# Altium PCB CAN Logger 3d HP3561 PCB.PcbDoc (part 1 of 3)
Units mil, origin at the board's own origin, x right, y up, seen from the top; angles counter-clockwise.
Board outline 2229 x 3254 mil, 4 copper layers (Component Side, Signal Layer 2, Signal Layer 1, Solder Side), stack 33.234 mil thick; 117 components, 131 nets, 581 pads, 372 vias.
Unrouted connection lines stored in the file: 2.
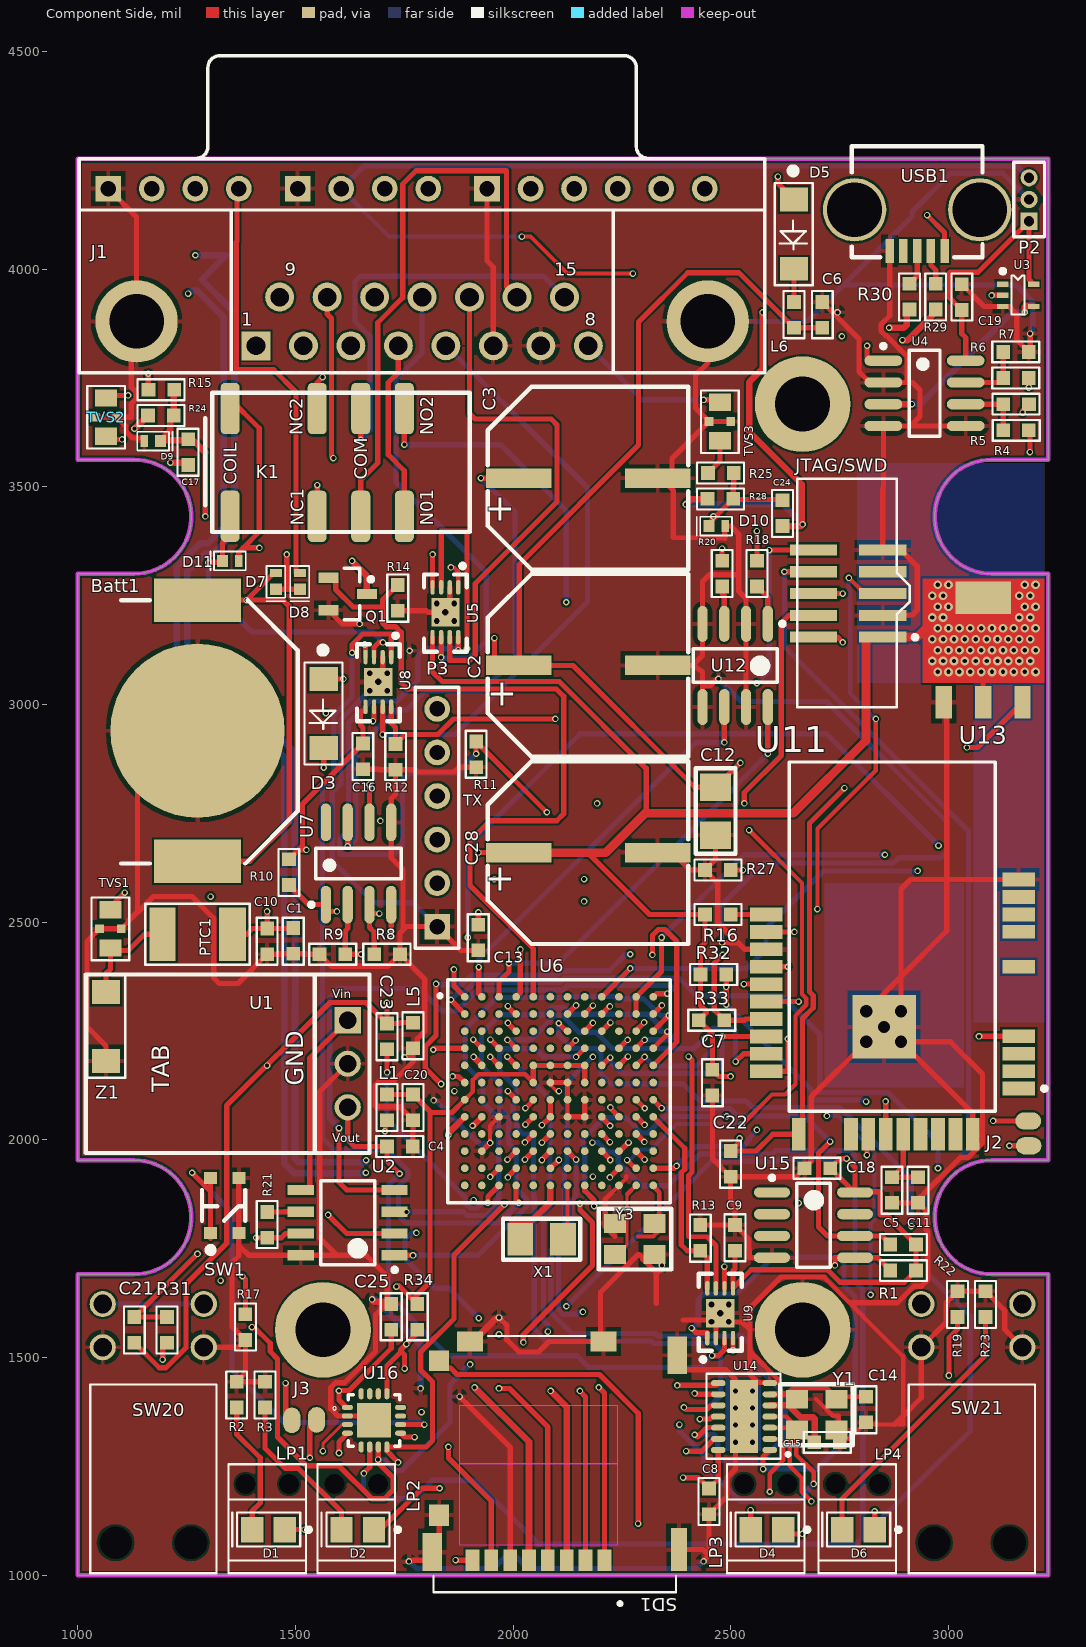
[diagram p0: Component Side view]
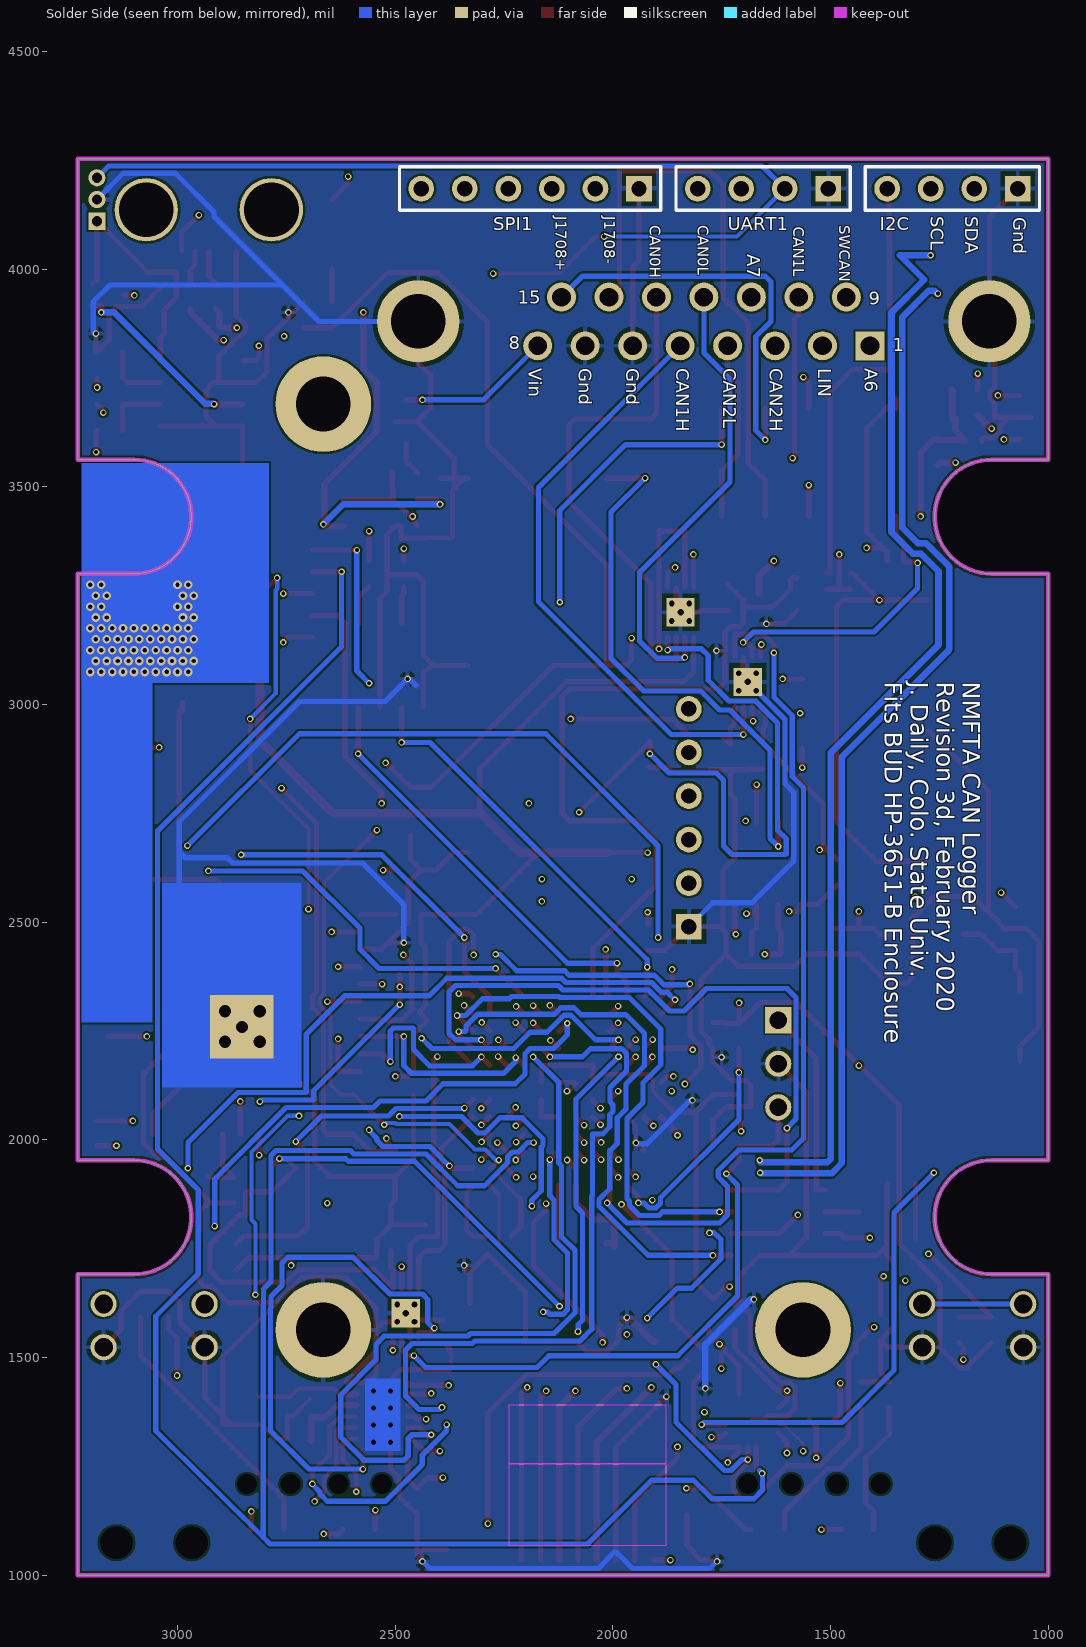
[diagram p1: Solder Side view, seen from below]
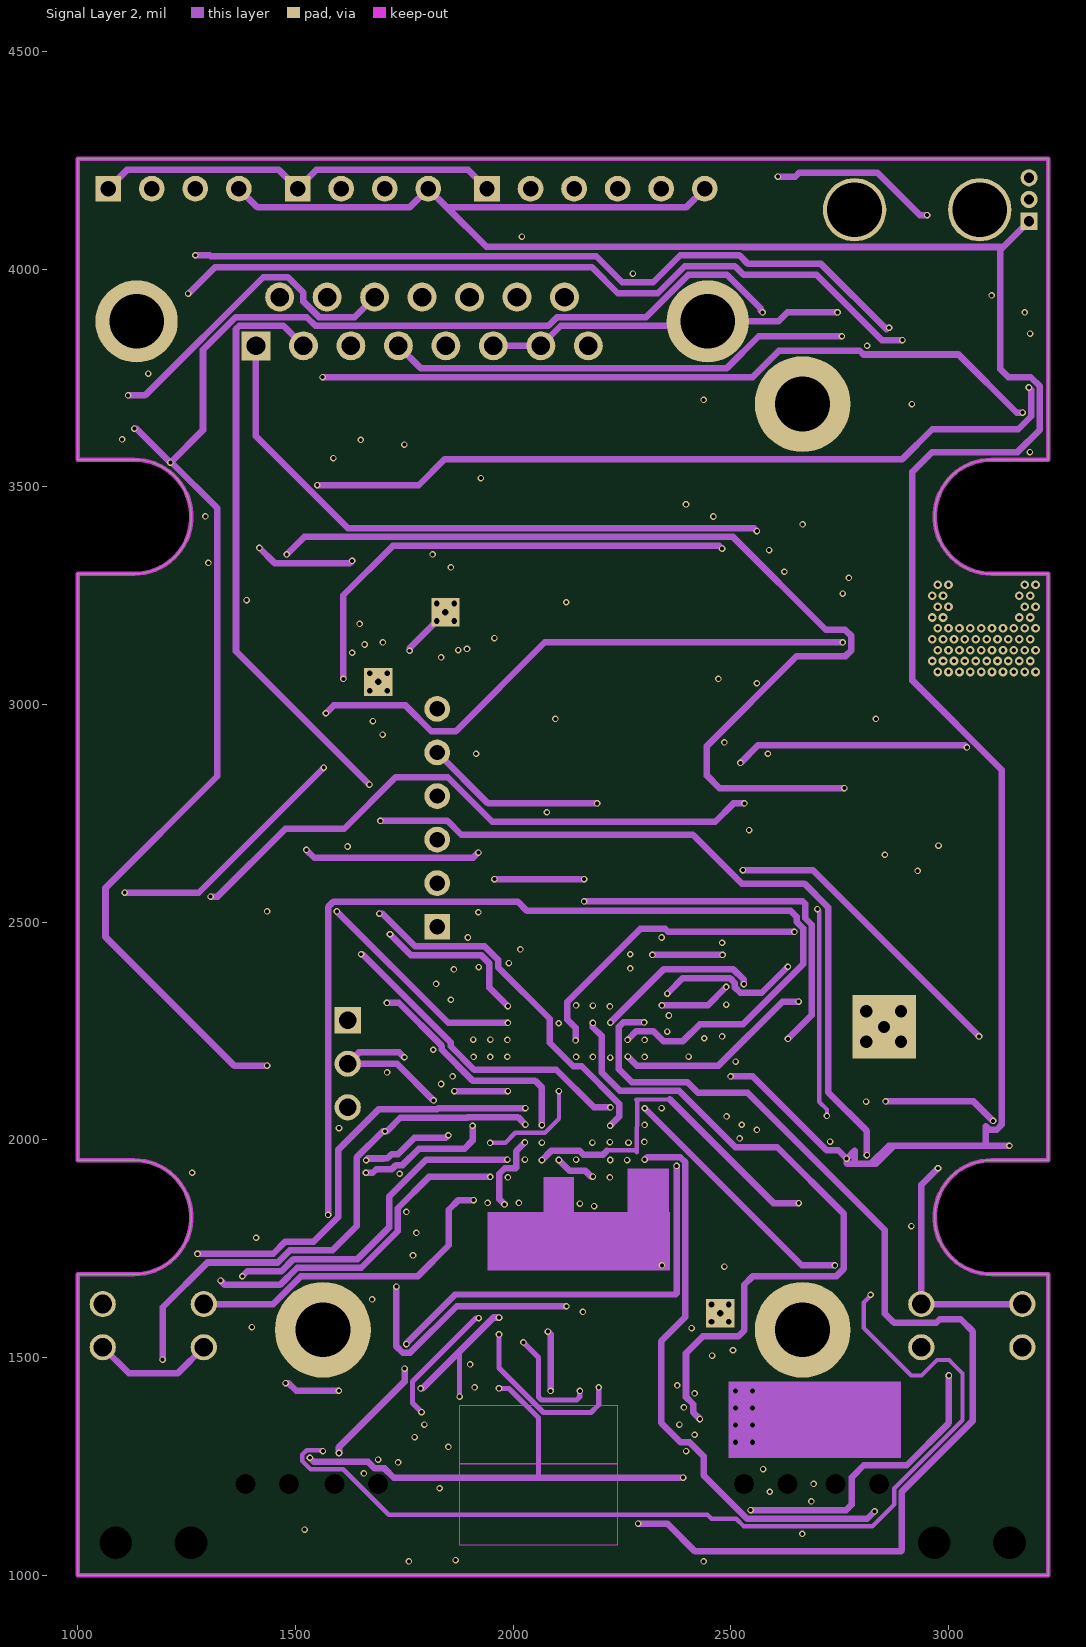
[diagram p2: Signal Layer 2]
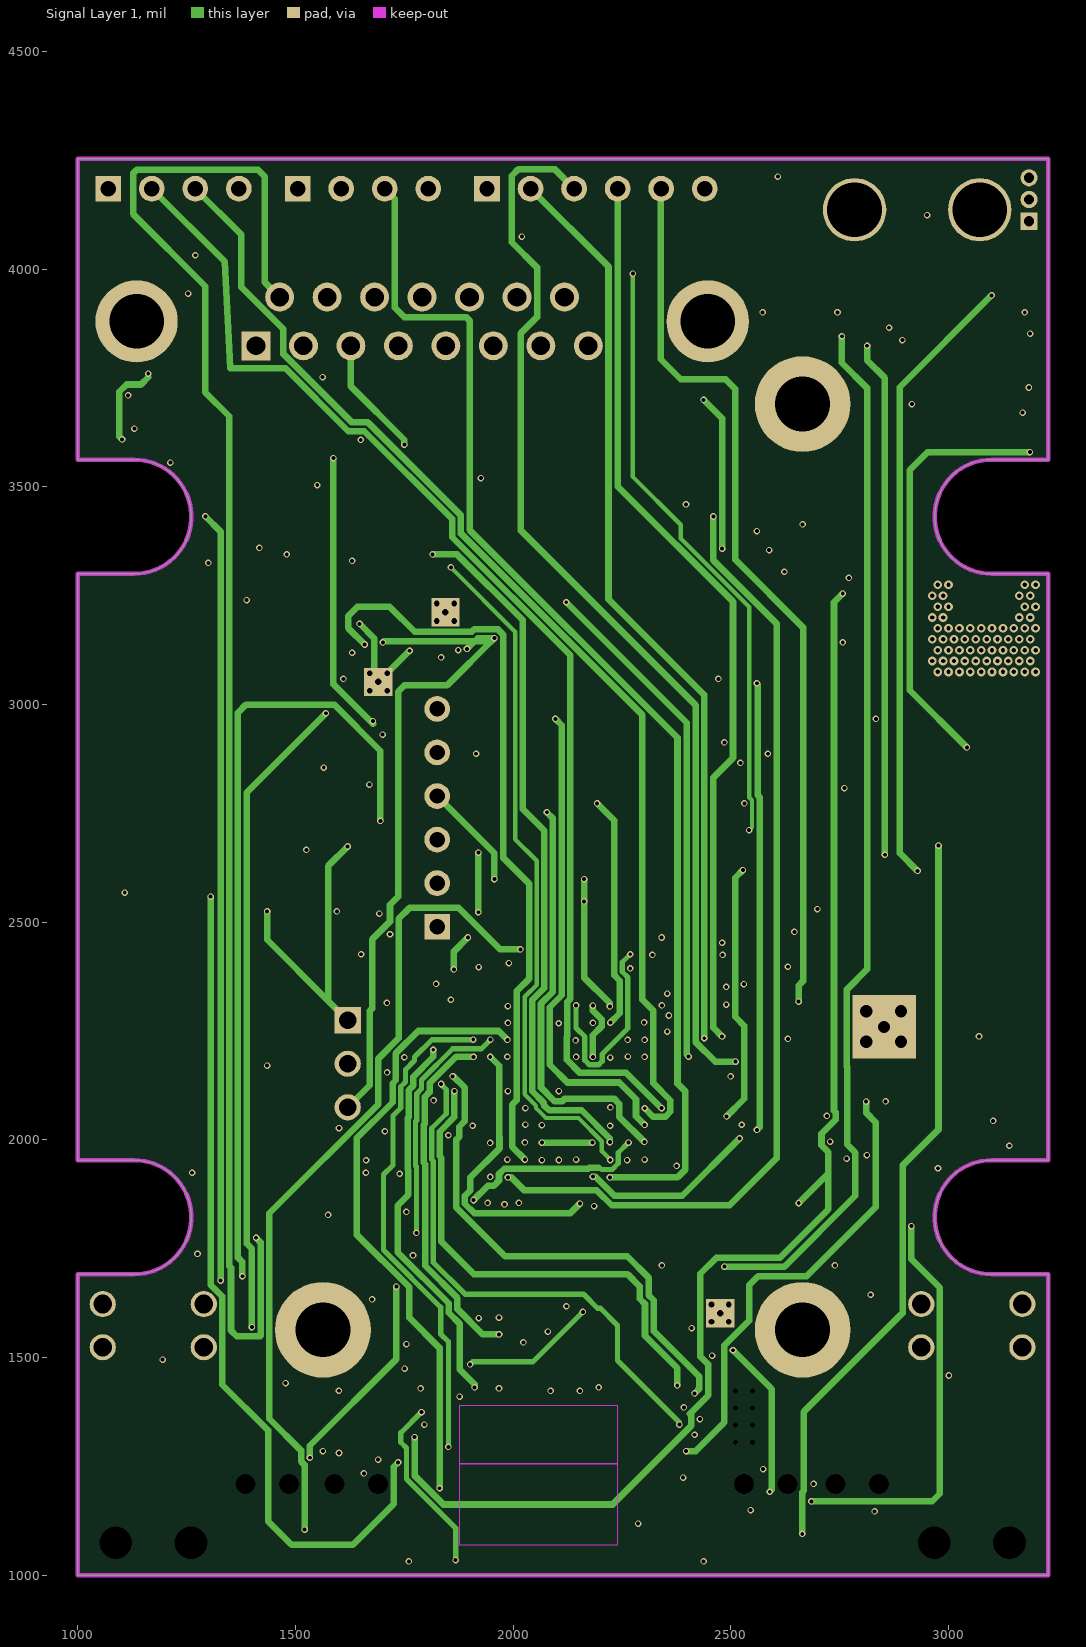
[diagram p3: Signal Layer 1]

## Layer stack, top to bottom
Top Solder: solder mask 0.4, Solder Resist, Dk 3.5
Component Side: signal copper 1.4
Dielectric 1: core 12.6, FR-4, Dk 4.8
Signal Layer 2: signal copper 1.417
Dielectric 5: prepreg 5, Dk 4.2
Signal Layer 1: signal copper 1.417
Dielectric 4: core 10, Dk 4.2
Solder Side: signal copper 1.4
Bottom Solder: solder mask 0.4, Solder Resist, Dk 3.5

## Board outline
1000,1000 1000,1691.5 1130,1691.5 ccw(c1130,1822.5) 1130,1953.5 1000,1953.5 1000,3300.5 1130,3300.5 ccw(c1130,3431.5) 1130,3562.5 1000,3562.5 1000,4254 3229,4254 3229,3562.5 3099,3562.5 ccw(c3099,3431.5) 3099,3300.5 3229,3300.5 3229,1953.5 3099,1953.5 ccw(c3099,1822.5) 3099,1691.5 3229,1691.5 3229,1000

## Design rules (kind name [scope] priority, off if disabled: settings)
Clearance [InComponent('U16')] p1: gap=3 ignorepadtopadclearanceinfootprint=TRUE
Clearance Clearance_1 [All] p2: gap=5 ignorepadtopadclearanceinfootprint=TRUE
DiffPairsRouting [All] p1: maxlimit=10 minlimit=10 mostfreqgap=10 toplayer_minwidth=15 toplayer_maxwidth=15 toplayer_prefwidth=15 midlayer1_minwidth=15 midlayer1_maxwidth=15 midlayer1_prefwidth=15 midlayer2_minwidth=15 midlayer2_maxwidth=15 midlayer2_prefwidth=15 bottomlayer_minwidth=15 bottomlayer_maxwidth=15 bottomlayer_prefwidth=15 maxuncoupledlength=500
HoleSize [All] p1: absolutevalues=TRUE maxlimit=250 minlimit=9 maxpercent=80.000 minpercent=20.000
MinimumSolderMaskSliver [All] p1: minsoldermaskwidth=1
PolygonConnect [All] p1: connectstyle=Relief reliefconductorwidth=10 reliefentries=4 polygonreliefangle="90 Angle" airgapwidth=10
RoomDefinition "DIY Teensy 3.6" [InComponentClass('DIY Teensy 3.6')] p1: confinementstyle=ConfineIn formatcopy=TRUE lockcomponents=FALSE outline 0,0 2000,0 2000,1000 0,1000
RoomDefinition "Additional Circuits - Handheld - Rev 3d" [InComponentClass('Additional Circuits - Handheld - Rev 3d')] p2: confinementstyle=ConfineIn formatcopy=TRUE lockcomponents=FALSE outline 0,0 2000,0 2000,1000 0,1000
RoutingVias [All] p1: holewidth=9 width=15 viastyle="Through Hole" minholewidth=9 minwidth=15 maxholewidth=28 maxwidth=50
SMDNeckDown [All] p1: percent=150.000
SilkToSilkClearance [All] p1: silktosilkclearance=1
SilkToSolderMaskClearance [IsPad] p1: minsilkscreentomaskgap=1 clearancetoexposedcopper=TRUE
SolderMaskExpansion [All] p1: expansion=4
Width Width_1 [All] p1: maxlimit=100 minlimit=7 preferedwidth=15 toplayer_prefwidth=12 midlayer1_minwidth=10 midlayer2_minwidth=10 bottomlayer_minwidth=10 bottomlayer_prefwidth=12 minimp=50.000000 maximp=50.000000 favimp=50.000000
25 further rules are at their usual default settings.

## Classes and differential pairs
component class "DIY Teensy 3.6": Batt1 C7 C13 C16 C18 C19 C20 C21 C22 C23 C25 D7 D8 J3 JTAG/SWD L1 L5 R31 R34 SD1 SW1 U6 U16 X1 Y3
component class "Teensy 3.6 with J1939 - Handheld Rev3d": C9 C10 C14 C15 C17 C24 D1 D2 D4 D6 D9 D10 I2C J1 P2 R2 R3 R8 R9 R10 R11 R12 R13 R15 R18 R19 R20 R21 R23 R24 R25 R28 R32 R33 SW20 SW21 TVS2 TVS3 U2 U5 U7 U8 U9 U12 U14 UART1 Y1
component class "Additional Circuits - Handheld - Rev 3d": C1 C2 C3 C4 C5 C6 C8 C11 C12 C28 D3 D5 D11 J2 K1 L6 LP1 LP2 LP3 LP4 P3 PTC1 Q1 R1 R4 R5 R6 R7 R14 R16 R17 R22 R27 R29 R30 SPI1 TVS1 U1 U3 U4 U11 U13 U15 USB1 Z1
differential pair "USB D": +"USB D_P" -"USB D_N"

## Components (designator, comment, footprint, x,y, rotation, side; value= is the part's Value field where it differs from the comment)
Batt1 "CR1225" "Battery Clip - CR1225" 1275,2940 r270 top locked
C1 "0.1uF" 0603 1495,2457.07 r90 top
C2 "470µF" "Elec. Cap - G" 2172.6,3090 r180 top locked
C3 "100uF" "Elec. Cap - G" 2172.6,3520 r180 top locked
C4 "0.1uF" 0603 1740,1985 r0 top
C5 "0.1uF" 0603 2870,1885 r90 top
C6 "0.1uF" 0603 2710,3895 r270 top
C7 "0.1uF" 0603 2457.6,2131.85 r90 top
C8 "0.1uF" 0603 2450,1170 r90 top
C9 "0.1uF" 0603 2509.37,1775 r270 top
C10 "2.2uF" 0603 1435,2455.93 r270 top
C11 "0.1uF" 0603 2930,1885 r90 top
C12 "22uF" 1206 2465,2755.12 r90 top
C13 "0.1uF" 0603 1920,2465 r90 top
C14 "16pF" 0603 2810.5,1380.85 r90 top
C15 "16pF" 0603 2720.85,1305.63 r180 top
C16 "2.2uF" 0603 1655,2881.15 r90 top
C17 "0.1uF" 0603 1253.5,3580 r90 top
C18 "0.1uF" 0603 2698.72,1935 r0 top
C19 "0.1uF" 0603 3030.55,3935.91 r270 top
C20 "0.1uF" 0603 1770,2075 r90 top
C21 "0.1uF" 0603 1130,1564 r90 top
C22 "0.1uF" 0603 2499.52,1945 r90 top
C23 "0.1uF" 0603 1710.47,2237.79 r90 top
C24 "0.1uF" 0603 2618.79,3439.53 r90 top
C25 "0.1uF" 0603 1720,1593.53 r270 top
C28 "470µF" "Elec. Cap - G" 2172.6,2660 r180 top locked
D1 "Green" "0805 POLARIZED" 1440,1105 r180 top
D2 "Red" "0805 POLARIZED" 1645,1105 r180 top
D3 "ACURA107-HF" "SMA with A and K" 1565,3059 r270 top
D4 "Yellow" "0805 POLARIZED" 2585,1105 r180 top
D5 "ACURA107-HF" "SMA with A and K" 2645,4160 r270 top
D6 "Blue" "0805 POLARIZED" 2795,1105 r180 top
D7 "Diode" CST2C 1455,3302.4 r180 top
D8 "Diode" CST2C 1510,3302.4 r180 top
D9 "Diode" CST2C 1152.64,3605 r270 top
D10 "Diode" CST2C 2486.93,3410 r90 top
D11 "Diode" CST2C 1370,3330 r90 top
I2C "Header 4" HDR1X4 1070,4185 r0 bottom
J1 "Vehicle Interface Cable Connector" DSUB1.385-2H15 1790.91,4254.02 r0 top locked
J2 "Solder Jumper" "Solder Jumper" 3185,2025 r90 top
J3 "Solder Jumper" "Solder Jumper" 1530,1355 r0 top
JTAG/SWD "JTAG/SWD" "JTAG 10-pin Header" 2769.53,3255 r90 top locked
K1 "EE2-5NU" "RELAY - EE2" 1350,3680 r0 top
L1 "1k" 0603 1710.47,2075 r90 top
L5 "1k" 0603 1770,2240 r90 top
L6 "1k" 0603 2645,3895 r270 top
LP1 "SLP3" PCBComponent_1 1524,1255 r180 top locked
LP2 "SLP3" PCBComponent_1 1729,1255 r180 top locked
LP3 "SLP3" PCBComponent_1 2669,1255 r180 top locked
LP4 "SLP3" PCBComponent_1 2879,1255 r180 top locked
P2 "DNP GP-20U7 JST Header" MHDR1X3 3185,4110 r90 top
P3 "Header 6" HDR1X6 1825.47,2490 r90 top
PTC1 "PTC RESTTBLE 0.75A" 1812 1275,2472.5 r0 top
Q1 "NUD3124" SOT23_N 1620,3254.1 r0 top
R1 "4.7k" 0603 2896,1700 r180 top
R2 "100" 0603 1365,1415 r90 top
R3 "330" 0603 1430,1415 r90 top
R4 "4.7k" 0603 3155,3630 r180 top
R5 "47" 0603 3155.47,3690 r0 top
R6 "47" 0603 3155,3750 r0 top
R7 "4.7k" 0603 3155,3810 r0 top
R8 "100k" 0603 1710.47,2426.39 r0 top
R9 "100k" 0603 1585,2426.61 r180 top
R10 "4.7k" 0603 1485,2615 r90 top
R11 "100k" 0603 1915,2885.47 r270 top
R12 "100k" 0603 1730,2880 r270 top
R13 "100k" 0603 2430,1775 r90 top
R14 "100k" 0603 1735,3245 r90 top
R15 "100k" 0603 1192,3723 r0 top
R16 "100k" 0603 2470,2517.79 r180 top
R17 "100k" 0603 1385,1570 r270 top
R18 "10k" 0603 2560,3300.5 r270 top
R19 "330" 0603 3020.84,1623 r90 top
R20 "10k" 0603 2480,3300.5 r270 top
R21 "4.7k" 0603 1435,1805 r270 top
R22 "4.7k" 0603 2896,1760 r180 top
R23 "330" 0603 3085,1623 r90 top
R24 "10k" 0603 1190.85,3664 r180 top
R25 "100k" 0603 2477.07,3531.85 r0 top
R27 "100k" 0603 2470,2620 r180 top
R28 "10k" 0603 2475.93,3472.53 r180 top
R29 "47" 0603 2970.55,3937.06 r90 top
R30 "47" 0603 2910.55,3937.06 r90 top
R31 "330" 0603 1205,1564 r90 top
R32 "100k" 0603 2460,2380 r180 top
R33 "100k" 0603 2455.62,2275 r180 top
R34 "10k" 0603 1779.75,1593.53 r270 top locked
SD1 "503182-1852" *MOLEX_503182-1852_503182-1852(PRIMARY) 2095.5,1285 r180 top locked
SPI1 "Header 6" HDR1X6 1940,4185 r0 bottom
SW1 "PTS830" "Switch PTS830" 1305,1786.65 r90 top
SW20 "PB400" PB400 1057.5,1623 r270 top locked
SW21 "PB400" PB400 2937.5,1623 r270 top locked
TVS1 "Varistor 42V" TRANSFEED 1075,2535 r270 top
TVS2 "Varistor 42V" TRANSFEED 1065,3710 r270 top
TVS3 "Varistor 42V" TRANSFEED 2475,3700 r270 top
U1 "OKI-78SR" OKI-78SR 1620,2075 r90 top locked
U2 "NCV7356D1R2G" ONSC-SOIC-8-751-07_V 1620,1810 r180 top
U3 "74AHCT1G14" SOT-353 3160,3940 r270 top
U4 "SN75HVD08DR" SOIC-SN8_N 2945,3715 r0 top
U5 "MCP2558" TDFN 1844.53,3212.09 r180 top
U6 "MK66FX1M0VMD18" *BGA144C100P12X12_1300X1300X170_MK66FX1M0VMD18(Primary) 2105.32,2112.17 r0 top locked
U7 "MCP2003A-E/SN" SOIC-SN8_N 1645,2635 r90 top
U8 "MCP2558" TDFN 1690.47,3052.09 r180 top
U9 "MCP2558" TDFN 2475.47,1602.09 r0 top
U11 "ATML-ATWINC1500-MR210PA-28" ATML-ATWINC1500-MR210PA-28_V 2871,2305.47 r180 top locked
U12 "MOCD207R2M" SOIC-8 2510,3090 r270 top
U13 "NCP1117LPST33" SOT-223 2988.9,3005 r0 top
U14 "MCP2517FD" SOP14 2589.37,1287.91 r180 top
U15 "ATECC608A" SOIC-8 2689.92,1804.53 r0 top
U16 "MKL02Z32VFG4" *QFN50P300X300X65-17N 1680.47,1356.02 r0 top locked
UART1 "Header 4" HDR1X4 1505,4185 r0 bottom
USB1 "UX60SC-MB-5S8" "USB Mini UX60S" 2927.99,4282.16 r180 top
X1 "32.768 KHz" "XTAL 2-pad Small" 2114.5,1771.89 r180 top
Y1 "40MHz" "XTAL 4 pad" 2742.49,1404.52 r180 top
Y3 "16MHz" "XTAL 4 pad" 2234.01,1737 r0 top
Z1 "SMA6J" SMA 1065,2181 r90 top

## Footprints (in the part's own frame and the unit in brackets; to place one, negate y for a bottom-side part, rotate by r counter-clockwise, add the part's x,y. Pads: shape width x height; smd on the part's side, far side on the other; paste and mask are expansions set on the pad)
0603 [mm] "0603 SMP Component with outline"
  rect 0.8x0.8 smd: 1(-0.75,0) 2(0.75,0)
  silkscreen extent -1.39,-0.61 1.36,0.61
"0805 POLARIZED" [mm] "Polarized 0805 with Pin 1 as Anode (+)"
  rect 1.3x1.5 smd: 1(-0.899,0) 2(1.001,0)
  silkscreen extent -2.39,-0.99 2.16,0.99
1206 [mm]
  rect 1.6x1.8 smd: 1(-1.4,0) 2(1.4,0)
  silkscreen extent -2.47,-1.16 2.5,1.15
1812 [mil] "Used for PTC Fuses from belfuse"
  rect 60x122 smd: 1(-80,0)
  rect 62x122 smd: 2(80,0)
  silkscreen extent -120,-70 120,70
*BGA144C100P12X12_1300X1300X170_MK66FX1M0VMD18(Primary) [mm]
  round 0.45 smd: A1(-5.5,5.5) A2(-4.5,5.5) A3(-3.5,5.5) A4(-2.5,5.5) A5(-1.5,5.5) A6(-0.5,5.5) A7(0.5,5.5) A8(1.5,5.5) A9(2.5,5.5) A10(3.5,5.5) A11(4.5,5.5) A12(5.5,5.5) B1(-5.5,4.5) B2(-4.5,4.5) B3(-3.5,4.5) B4(-2.5,4.5) B5(-1.5,4.5) B6(-0.5,4.5) B7(0.5,4.5) B8(1.5,4.5) B9(2.5,4.5) B10(3.5,4.5) B11(4.5,4.5) B12(5.5,4.5) C1(-5.5,3.5) C2(-4.5,3.5) C3(-3.5,3.5) C4(-2.5,3.5) C5(-1.5,3.5) C6(-0.5,3.5) C7(0.5,3.5) C8(1.5,3.5) C9(2.5,3.5) C10(3.5,3.5) C11(4.5,3.5) C12(5.5,3.5) D1(-5.5,2.5) D2(-4.5,2.5) D3(-3.5,2.5) D4(-2.5,2.5) D5(-1.5,2.5) D6(-0.5,2.5) D7(0.5,2.5) D8(1.5,2.5) D9(2.5,2.5) D10(3.5,2.5) D11(4.5,2.5) D12(5.5,2.5) E1(-5.5,1.5) E2(-4.5,1.5) E3(-3.5,1.5) E4(-2.5,1.5) E5(-1.5,1.5) E6(-0.5,1.5) E7(0.5,1.5) E8(1.5,1.5) E9(2.5,1.5) E10(3.5,1.5) E11(4.5,1.5) E12(5.5,1.5) F1(-5.5,0.5) F2(-4.5,0.5) F3(-3.5,0.5) F4(-2.5,0.5) F5(-1.5,0.5) F6(-0.5,0.5) F7(0.5,0.5) F8(1.5,0.5) F9(2.5,0.5) F10(3.5,0.5) F11(4.5,0.5) F12(5.5,0.5) G1(-5.5,-0.5) G2(-4.5,-0.5) G3(-3.5,-0.5) G4(-2.5,-0.5) G5(-1.5,-0.5) G6(-0.5,-0.5) G7(0.5,-0.5) G8(1.5,-0.5) G9(2.5,-0.5) G10(3.5,-0.5) G11(4.5,-0.5) G12(5.5,-0.5) H1(-5.5,-1.5) H2(-4.5,-1.5) H3(-3.5,-1.5) H4(-2.5,-1.5) H5(-1.5,-1.5) H6(-0.5,-1.5) H7(0.5,-1.5) H8(1.5,-1.5) H9(2.5,-1.5) H10(3.5,-1.5) H11(4.5,-1.5) H12(5.5,-1.5) J1(-5.5,-2.5) J2(-4.5,-2.5) J3(-3.5,-2.5) J4(-2.5,-2.5) J5(-1.5,-2.5) J6(-0.5,-2.5) J7(0.5,-2.5) J8(1.5,-2.5) J9(2.5,-2.5) J10(3.5,-2.5) J11(4.5,-2.5) J12(5.5,-2.5) K1(-5.5,-3.5) K2(-4.5,-3.5) K3(-3.5,-3.5) K4(-2.5,-3.5) K5(-1.5,-3.5) K6(-0.5,-3.5) K7(0.5,-3.5) K8(1.5,-3.5) K9(2.5,-3.5) K10(3.5,-3.5) K11(4.5,-3.5) K12(5.5,-3.5) L1(-5.5,-4.5) L2(-4.5,-4.5) L3(-3.5,-4.5) L4(-2.5,-4.5) L5(-1.5,-4.5) L6(-0.5,-4.5) L7(0.5,-4.5) L8(1.5,-4.5) L9(2.5,-4.5) L10(3.5,-4.5) L11(4.5,-4.5) L12(5.5,-4.5) M1(-5.5,-5.5) M2(-4.5,-5.5) M3(-3.5,-5.5) M4(-2.5,-5.5) M5(-1.5,-5.5) M6(-0.5,-5.5) M7(0.5,-5.5) M8(1.5,-5.5) M9(2.5,-5.5) M10(3.5,-5.5) M11(4.5,-5.5) M12(5.5,-5.5)
  silkscreen extent -7.05,-6.5 6.5,6.5
*MOLEX_503182-1852_503182-1852(PRIMARY) [mm]
  rect 0.8x1.24 smd: 1(-2.9,6.355) 2(-1.8,6.355) 3(-0.7,6.355) 4(0.4,6.355) 5(1.5,6.355) 6(2.6,6.355) 7(3.7,6.355) 8(4.8,6.355)
  rect 1.16x1.2 smd: DT(6.74,-5.275)
  rect 0.95x2.5 smd: P1(-7.245,5.725)
  rect 1.15x2.2 smd: P2(7.145,5.875) P3(-7.145,-5.605)
  rect 1.5x1.15 smd: P4(-2.84,-6.4) P5(4.94,-6.4)
  rect 1.16x1.25 smd: SW(6.74,3.725)
  Keep-Out Layer region: -3.655,5.485 5.55,5.485 5.55,0.726 -3.655,0.726
  Keep-Out Layer region: -3.659,0.725 5.55,0.725 5.55,-2.682 -3.659,-2.682
  silkscreen extent -7.07,-6.72 7.07,8.99
*QFN50P300X300X65-17N [mm]
  oval 0.65x0.3 smd: 1(-1.55,0.75) 2(-1.55,0.25) 3(-1.55,-0.25) 4(-1.55,-0.75) 9(1.55,-0.75) 10(1.55,-0.25) 11(1.55,0.25) 12(1.55,0.75)
  oval 0.3x0.65 smd: 5(-0.75,-1.55) 6(-0.25,-1.55) 7(0.25,-1.55) 8(0.75,-1.55) 13(0.75,1.55) 14(0.25,1.55) 15(-0.25,1.55) 16(-0.75,1.55)
  rect 2x2 smd: 17(0,0)
  silkscreen extent -2.4,-1.5 1.5,1.5
ATML-ATWINC1500-MR210PA-28_V [mm] "Module, 28-Leads, Body 21.72x14.73mm, Pitch 1.016mm"
  rect 1.9x0.8 smd: 1(-7.365,4.761) 2(-7.365,3.745) 3(-7.365,2.729) 4(-7.365,1.713) 5(-7.365,-2.351) 6(-7.365,-4.383) 7(-7.365,-5.399) 8(-7.365,-6.415) 9(-7.365,-7.431) 10(7.365,-5.393) 11(7.365,-4.377) 12(7.365,-3.361) 13(7.365,-2.345) 14(7.365,-1.329) 15(7.365,-0.313) 16(7.365,0.703) 17(7.365,1.719) 18(7.365,2.735) 19(7.365,3.751)
  rect 0.8x1.9 smd: 20(5.465,7.431) 21(2.417,7.431) 22(1.401,7.431) 23(0.385,7.431) 24(-0.631,7.431) 25(-1.647,7.431) 26(-2.663,7.431) 27(-3.679,7.431) 28(-4.695,7.431)
  rect 3.7x3.7 hole 0.711: 29(0.485,1.161)
  silkscreen extent -8.99,-14.29 6.01,6.08, body extent -7.36,-14.29 7.36,7.43, height 3.35
"Battery Clip - CR1225" [mil] "Battery Holder Outlline for CR2032"
  rect 100x200 smd: 1(-300,0) 1(300,0)
  round 400 smd: 2(0,0)
  silkscreen extent -300,-175 305,230
CST2C [mm] "Toshiba 0603 diode"
  rect 0.7x0.45 smd: 1(0,0)
  rect 0.7x0.65 smd: 2(0,0.95)
  silkscreen extent -0.55,-0.4 0.55,1.65
DSUB1.385-2H15 [mm] "Connector; D Subminiature; 15 Position; Right Angle; Pitch 1.385 mm"
  rect 1.69x1.69 hole 1.09: 1(-9.695,-10.92)
  round 1.69 hole 1.09: 2(-6.925,-10.92) 3(-4.155,-10.92) 4(-1.385,-10.92) 5(1.385,-10.92) 6(4.155,-10.92) 7(6.925,-10.92) 8(9.695,-10.92) 9(-8.31,-8.08) 10(-5.54,-8.08) 11(-2.77,-8.08) 12(0,-8.08) 13(2.77,-8.08) 14(5.54,-8.08) 15(8.31,-8.08)
  round 4.8 hole 3.18: 16(-16.66,-9.5) 17(16.66,-9.5)
  silkscreen extent -20,-12.5 20,6
"Elec. Cap - G" [mil] "Panasonic Style Electrolytic capacitor, Can size G, 10mm diameter"
  rect 150x45 smd: 1(159.45,0) 2(-159.45,0)
  silkscreen extent -229,-210 231,210
HDR1X4 [mm] "Connector; Header; 4 Position"
  rect 1.5x1.5 hole 0.9: 1(0,0)
  round 1.5 hole 0.9: 2(2.54,0) 3(5.08,0) 4(7.62,0)
  silkscreen extent -1.27,-1.27 8.89,1.27
HDR1X6 [mm] "Connector; Header; 6 Position"
  rect 1.5x1.5 hole 0.9: 1(0,0)
  round 1.5 hole 0.9: 2(2.54,0) 3(5.08,0) 4(7.62,0) 5(10.16,0) 6(12.7,0)
  silkscreen extent -1.27,-1.27 13.97,1.27
"JTAG 10-pin Header" [mm] "1.27mm pitch Box Header SMT Type"
  rect 0.65x2.76 smd: 1(-2.54,-2.02) 2(-2.54,2.02) 3(-1.27,-2.02) 4(-1.27,2.02) 5(0,-2.02) 6(0,2.02) 7(1.27,-2.02) 8(1.27,2.02) 9(2.54,-2.02) 10(2.54,2.02)
  silkscreen extent -6.64,-4.03 6.71,2.97
MHDR1X3 [mm] "Connector; Header; 3 Position"
  rect 1x1 hole 0.6: 1(0,0)
  round 1 hole 0.6: 2(1.27,0) 3(2.54,0)
  silkscreen extent -0.9,-0.9 3.44,0.9
OKI-78SR [mil] "Horizontal Mount SIP DC/DC Converter"
  rect 60x60 hole 40: 1(200,0)
  round 60 hole 40: 2(100,0) 3(0,0)
  silkscreen extent -105,-50 305,602
ONSC-SOIC-8-751-07_V [mm] "SOIC, 8-Leads, Body 4.9x3.9mm, Pitch 1.27mm"
  rect 1.52x0.6 smd: 1(-2.74,1.905) 2(-2.74,0.635) 3(-2.74,-0.635) 4(-2.74,-1.905) 5(2.74,-1.905) 6(2.74,-0.635) 7(2.74,0.635) 8(2.74,1.905)
  silkscreen extent -2.87,-2.45 1.58,2.88, body extent -1.95,-2.45 1.95,2.45, height 1.75
PB400 [mil]
  round 60 hole 43: 1(0,0) 2(99,0) 3(0,232) 4(99,232)
  round 0 hole 75: ""(548,29.5) ""(548,202.5)
  silkscreen extent 185,-29 618,261
PCBComponent_1 [mil]
  round 0 hole 46: ""(39,45) ""(139,45)
  silkscreen extent 0,0 178,250
"RELAY - EE2" [mm] "EE2 Relay"
  rrect50% 1.11x3 smd: 1(7.62,0) 2(5.08,0) 3(10.16,0) 4(7.62,-6.29) 5(5.08,-6.29) 6(10.16,-6.29) 7(0,-6.29) 8(0,0)
  silkscreen extent -1.45,-7.2 13.98,0.92
SMA [mil] "SMA with outline"
  rect 55x65 smd: 1(0,0) 2(159,0)
  silkscreen extent -38,-44 197,43
"SMA with A and K" [mil] "SMA with outline and Cathode Bar on Pin 2"
  rect 55x65 smd: 1(0,0) 2(159,0)
  silkscreen extent -71,-44 197,43
SOIC-8 [mm]
  oval 2.1x0.6 smd: 1(-2.425,1.905) 2(-2.425,0.635) 3(-2.425,-0.635) 4(-2.425,-1.905) 5(2.425,-1.905) 6(2.425,-0.635) 7(2.425,0.635) 8(2.425,1.905)
  silkscreen extent -2.55,-2.45 0.98,2.88
SOIC-SN8_N [mm] "SOIC, 8-Leads, Body 4.9x3.8mm, Pitch 1.27mm, IPC Medium Density"
  oval 2.2x0.6 smd: 1(-2.4,1.905) 2(-2.4,0.635) 3(-2.4,-0.635) 4(-2.4,-1.905) 5(2.4,-1.905) 6(2.4,-0.635) 7(2.4,0.635) 8(2.4,1.905)
  silkscreen extent -2.52,-2.5 0.9,2.88, body extent -2,-2.5 2,2.5, height 1.75
"Solder Jumper" [mm]
  rrect100% 1x1.5 smd: 1(-0.974,0.025) 2(0.475,0.05)
SOP14 [mm]
  oval 0.85x0.35 smd: 1(0,0) 2(0,-0.65) 3(0,-1.3) 4(0,-1.95) 5(0,-2.6) 6(0,-3.25) 7(0,-3.9) 8(3,-3.9) 9(3,-3.25) 10(3,-2.6) 11(3,-1.95) 12(3,-1.3) 13(3,-0.65) 14(3,0)
  round 0 hole 0.3: ""(1,-1.45) ""(1,-3.45) ""(1,-2.45) ""(1,-0.45) ""(2,-1.45) ""(2,-3.45) ""(2,-2.45)
  rect 1.65x4.25 smd: ""(1.5,-1.95)
  round 0.3 hole 0.3: ""(2,-0.45)
  silkscreen extent -1.14,-4.44 3.68,0.51
SOT23_N [mm] "SOT23, 3-Leads, Body 2.9x1.3mm, Pitch 0.95mm, Lead Span 2.3mm - Reverse Pinning, IPC Medium Density"
  rect 1.15x0.6 smd: 1(-1.125,0.95) 2(-1.125,-0.95) 3(1.125,0)
  silkscreen extent -0.2,-1.5 1.48,1.5, body extent -0.7,-1.5 0.7,1.5, height 1.1
SOT-223 [mm]
  rect 0.95x1.9 smd: 1(0,0) 2(2.3,0) 3(4.6,0)
  rect 3.25x1.9 smd: 4(2.3,6.1)
SOT-353 [mil]
  rect 12x26 smd: 1(-25.59,-35.43) 2(0,-35.43) 3(25.59,-35.43) 4(25.59,35.43) 6(-25.59,35.43)
  silkscreen extent -61,-40 44,15
"Switch PTS830" [mm] "Microminiature SMT Top Actuated C&K PTS830"
  rect 0.7x0.75 smd: 1(0,0) 2(3.2,0) 3(0,-1.65) 4(3.2,-1.65)
  silkscreen extent -1.1,-2.02 2.5,0.5
TDFN [mm] "8-Lead Plastic Dual Flat, No Lead Package (MN) – 2x3x0.75mm Body [TDFN]"
  rect 1.651x1.651 hole 0.381: 0(0,0)
  oval 0.25x0.85 smd: 1(-0.75,-1.45) 2(-0.25,-1.45) 3(0.25,-1.45) 4(0.75,-1.45) 5(0.75,1.45) 6(0.25,1.45) 7(-0.25,1.45) 8(-0.75,1.45)
  silkscreen extent -1.25,-2.83 1.25,2.3
TRANSFEED [mil] "AVX Multilayer Ceramic Transient Voltage Suppressors"
  rect 40x50 smd: 1(5.91,0) 2(94.09,0)
  rect 20x20 smd: 3(50,25) 3(50,-25)
  silkscreen extent -22,-43 122,43
"USB Mini UX60S" [mm] "Receptacle - Standard - Shell through Hole"
  round 3.7 hole 3.2: 0(-3.65,3.7) 0(3.65,3.7)
  rect 0.5x1.4 smd: 1(-1.6,6.1) 2(-0.8,6.1) 3(0,6.1) 4(1.6,6.1) 5(0.8,6.1)
  silkscreen extent -3.81,0 3.81,6.48
"XTAL 2-pad Small" [mm] "ECX-.327-CDX-1293SMD CRYSTAL"
  rect 1.5x1.9 smd: 1(0,0) 2(2.5,0)
  silkscreen extent -1,-1.2 3.5,1.2
"XTAL 4 pad" [mm] "16MHz ±30ppm Crystal 18pF 80 Ohms 4-SMD, No Lead XTAL 4 pad ECS Inc.  ECS-160-18-33Q-DS"
  rect 1.3x1.1 smd: 1(0,0) 2(2.3,0) 3(2.3,1.8) 4(0,1.8)
  silkscreen extent -0.95,-0.87 3.27,2.68

## Part data
Batt1: library part "CR2032 Battery Holder", "Lithium Battery Non-Rechargeable (Primary) 3V Coin, 12.5mm", Manufacturer=Linx, PartNumber=BAT-HLD-012-SMT, Supplier Part Number 1=BAT-HLD-012-SMT-ND, Supplier 1=Digi-Key
C1 C4 C5 C6 C7 C8 C9 C11 C13 C17 C18 C19 C20 C21 C22 C23 C24 C25: library part Cap, "CAP CER 0.1UF 50V X7R 0603", Manufacturer=KEMET, PartNumber=C0603C104K5RACAUTO, Supplier Part Number 1=399-6856-1-ND, Alternative=Acceptable, Supplier 1=Digi-Key
C2 C28: library part "Tantalum Cap_1", "470µF 16V Aluminum Electrolytic Capacitors Radial, Can - SMD  5000 Hrs @ 105°C", Manufacturer="Panasonic Electronic Components", PartNumber=EEE-HC1C471P, Supplier Part Number 1=PCE3751CT-ND, Supplier 1=Digi-Key
C3: library part "Tantalum Cap_1", "Aluminum Electrolytic Capacitors Radial, Can - SMD 5000 Hrs @ 105°C", Manufacturer="Panasonic Electronic Components", PartNumber=EEE-HC1H101P, Supplier Part Number 1=P19732CT-ND, Supplier 1=Digi-Key
C10 C16: library part Cap, "2.2µF ±10% 6.3V Ceramic Capacitor X5R 0603 (1608 Metric)", Manufacturer="Taiyo Yuden", PartNumber=JMK107BJ225KAHT, Supplier Part Number 1=587-3386-1-ND, Alternative=Acceptable, Supplier 1=Digi-Key
C12: library part Cap, "22µF ±20% 25V Ceramic Capacitor X5R 1206 (3216 Metric)", Manufacturer="Murata Electronics North America", PartNumber=GRT31CR61E226ME01L, Supplier Part Number 1=490-12451-1-ND, Supplier 1=Digi-Key
C14 C15: library part Cap, "16pF ±5% 50V Ceramic Capacitor C0G, NP0 0603 (1608 Metric)", Manufacturer=Yageo, PartNumber=CC0603JRNPO9BN160, Supplier Part Number 1=311-3964-1-ND, Alternative=Acceptable, Supplier 1=Digi-Key
D1: library part "LED - SMD", "Green 570nm LED Indication - Discrete 2.2V 0805 (2012 Metric)", Manufacturer="OSRAM Opto Semiconductors Inc.", PartNumber="LG R971-KN-1", Supplier Part Number 1=475-1410-1-ND, Supplier 1=Digi-Key
D2: library part "LED - SMD", "Red 633nm LED Indication - Discrete 2V 0805 (2012 Metric)", Manufacturer="OSRAM Opto Semiconductors Inc.", PartNumber="LS R976-NR-1", Supplier Part Number 1=475-1278-1-ND, Supplier 1=Digi-Key
D3 D5: library part "Schottky Diode", "Diode Schottky 1000V 1A Surface Mount DO-214AC (SMA)", Manufacturer="Comchip Technology", Supplier Part Number 1=641-1884-1-ND, PartNumber=ACURA107-HF, Supplier 1=Digi-Key
D4: library part "LED - SMD", "LED YELLOW DIFFUSED 0805 SMD", Manufacturer="OSRAM Opto Semiconductors Inc.", PartNumber="LY R976-PS-36", Supplier Part Number 1=475-2560-1-ND, Supplier 1=Digi-Key
D6: library part "LED - SMD", "Blue 470nm LED Indication - Discrete 3.3V 0805 (2012 Metric)", Manufacturer="Broadcom Limited", PartNumber=HSMN-C170, Supplier Part Number 1=516-1437-1-ND, Supplier 1=Digi-Key
D7 D8 D9 D10 D11: "Default Diode", Manufacturer="Toshiba Semiconductor and Storage", PartNumber=CCS15S30L3FCT-ND, Supplier 1=Digi-Key, Supplier Part Number 1=CCS15S30L3FCT-ND
I2C UART1: "Header, 4-Pin"
J1: library part "D Connector 15", "Receptacle Assembly, 15 Position, Right Angle", Manufacturer="Amphenol FCI", PartNumber=D15S33E4GV00LF, Supplier Part Number 1=609-1498-ND, Supplier 1=Digi-Key
JTAG/SWD: library part "JTAG Cortex", "Connector Header Surface Mount 10 position 0.050\" (1.27mm)", Manufacturer="CNC Tech", PartNumber=3221-10-0300-00, Supplier Part Number 1=1175-1735-ND, Supplier 1=Digi-Key
K1: library part "DPDT Relay", "General Purpose Relay DPDT (2 Form C) Surface Mount", Manufacturer=KEMET, PartNumber=EE2-5NU-L, Supplier Part Number 1=399-11017-1-ND, Supplier 1=Digi-Key
L1 L5 L6: library part "Ferrite Bead", "Ferrite Beads Multi-Layer Power 1KOhm 25% 100MHz 1A 200mOhm DCR 0603 Automotive T/R", Manufacturer=Murata, PartNumber=BLM18KG102SZ1D, Supplier Part Number 1=490-17350-1-ND, Alternative=Acceptable, Supplier 1=Digi-Key
LP1 LP2 LP3 LP4: "Light Pipe Single Clear Rigid Round with Domed Top, 3mm Board Mount, Press Fit, Right Angle", Manufacturer="Bivar Inc.", PartNumber=SLP3-150-250-R, Supplier Part Number 1=492-2517-ND, Supplier 1=Digi-Key
P2: library part MHDR1X3, "CONN HEADER PH SIDE 3POS 2MM SMD", Manufacturer=JST, PartNumber=S3B-PH-SM4-TB(LF)(SN), Supplier Part Number 1=455-1750-1-ND, Supplier 1=Digi-Key
P3 SPI1: "Header, 6-Pin"
PTC1: library part PTC, "PTC RESTTBLE 0.75A 33V CHIP 1812", Manufacturer="Bel Fuse Inc.", PartNumber=0ZCG0075BF2B, Supplier Part Number 1=507-1765-1-ND, Supplier 1=Digi-Key
Q1: library part IRLML6344TRPbF, "IC INDCT LOAD DRVR AUTO SOT23", Manufacturer="ON Semiconductor", PartNumber=NUD3124LT1G, Supplier Part Number 1=NUD3124LT1GOSCT-ND, Alternative=None, Supplier 1=Digi-Key
R1 R4 R7 R10 R21 R22: library part "Chip Resistor", "4.7 kOhms ±1% 0.1W, 1/10W Chip Resistor 0603 (1608 Metric) Automotive AEC-Q200, High Voltage Thick Film", Manufacturer="Rohm Semiconductor", PartNumber=KTR03EZPF4701, Supplier Part Number 1=RHM4.7KAYCT-ND, Alternative=Acceptable, Supplier 1=Digi-Key
R2: library part "Chip Resistor", "100 Ohms ±1% 0.1W, 1/10W Chip Resistor 0603 (1608 Metric) Automotive AEC-Q200, High Voltage Thick Film", Manufacturer="Rohm Semiconductor", PartNumber=KTR03EZPF1000, Supplier Part Number 1=RHM100AYCT-ND, Alternative=Acceptable, Supplier 1=Digi-Key
R3 R19 R23 R31: library part "Chip Resistor", "330 Ohms ±1% 0.1W, 1/10W Chip Resistor 0603 (1608 Metric) Automotive AEC-Q200, High Voltage Thick Film", Manufacturer="Rohm Semiconductor", PartNumber=KTR03EZPF3300, Supplier Part Number 1=RHM330AYCT-ND, Alternative=Acceptable, Supplier 1=Digi-Key
R5 R6 R29 R30: library part "Chip Resistor", "±1% 0.1W, 1/10W Chip Resistor 0603 (1608 Metric) Automotive AEC-Q200, High Voltage Thick Film", Manufacturer="Rohm Semiconductor", PartNumber=KTR03EZPF47R0, Supplier Part Number 1=RHM47AYCT-ND, Supplier 1=Digi-Key
R8 R9 R11 R12 R13 R14 R15 R16 R17 R25 R27 R32 R33: library part "Chip Resistor", "100 kOhms ±1% 0.1W, 1/10W Chip Resistor 0603 (1608 Metric) Automotive AEC-Q200, High Voltage Thick Film", Manufacturer="Rohm Semiconductor", PartNumber=KTR03EZPF1003, Supplier Part Number 1=RHM100KAYCT-ND, Alternative=Acceptable, Supplier 1=Digi-Key
R18 R20 R24 R28 R34: library part "Chip Resistor", "10 kOhms ±1% 0.1W, 1/10W Chip Resistor 0603 (1608 Metric) Automotive AEC-Q200, High Voltage Thick Film", Manufacturer="Rohm Semiconductor", PartNumber=KTR03EZPF1002, Supplier Part Number 1=RHM10.0KAYCT-ND, Alternative=Acceptable, Supplier 1=Digi-Key
SD1: "MICRO SD NORMAL ULTRALOWPRO8CKTE", Manufacturer=Molex, PartNumber=5031821852, Supplier Part Number 1=WM12834CT-ND, Supplier 1=Digi-Key
SW1: library part "Switch - Tactile_2", "Tactile Switch SPST-NO Top Actuated Surface Mount", Manufacturer="C & K Components", PartNumber="PTS830GM140 SMTR LFS", Supplier Part Number 1=CKN10587CT-ND, Supplier 1=Digi-Key
SW20 SW21: "Pushbutton Switch DPST-NO Standard Through Hole, Right Angle", Manufacturer=E-Switch, PartNumber=PB400OAQR1BLK, Supplier Part Number 1=EG5548-ND, Supplier 1=Digi-Key
TVS1 TVS2 TVS3: library part Transfeed, "VARISTOR CAP FEEDTHRU 18V 0805", Manufacturer=AVX, PartNumber=V2F118A400Y2EDP, Supplier Part Number 1=478-2485-1-ND, Supplier 1=Digi-Key
U1: library part 7805, "5V DC/DC Converter (7805 replacement)", Manufacturer="Murata Power Solutions Inc.", PartNumber=OKI-78SR-5/1.5-W36H-C, Supplier Part Number 1=811-2692-ND, Supplier 1=Digi-Key
U2: library part NCV7356D1G, "Single Wire CAN Transceiver, 5 to 27 V, 8-Pin SOIC, Pb-Free, Tube", Manufacturer="On Semiconductor", Supplier Part Number 1=NCV7356D1R2GOSCT-ND, PartNumber=NCV7356D1R2G, Supplier 1=Digi-Key
U3: library part "74AHCT1G14 Inverter", "IC SCHMIT-TRIGG INV GATE SOT353", Manufacturer="Diodes Incorporated", PartNumber=74AHCT1G14SE-7, Supplier Part Number 1=74AHCT1G14SE-7DICT-ND, Supplier 1=Digi-Key
U4: library part "SN75HVD12D (3.3v RS485)", "IC RS485 TXRX 3/5V 8-SOIC", Manufacturer="Texas Instruments", Supplier Part Number 1=296-37893-1-ND, PartNumber=SN75HVD08DR, Supplier 1=Digi-Key
U5: library part MCP2558FD, "Microchip CAN FD Transceiver with Silent Mode", Manufacturer="Microchip Technology", PartNumber=MCP2558FDT-H/MNY, Supplier Part Number 1=MCP2558FDT-H/MNYCT-ND, Supplier 1=Digi-Key
U6: "Kinetis K66: 180MHz Cortex-M4F MCU, 1.2MB Flash, 256KB SRAM, 2xUSB, Ethernet, 144-MAPBGA", Manufacturer="NXP USA Inc.", Supplier Part Number 1=568-13335-ND, PartNumber=MK66FX1M0VMD18, Supplier 1=Digi-Key
U7: library part MCP2003AT-E/SN, "LIN J2602 Transceiver, 8-Pin SOIC, Extended Temperature, Tape and Reel", Manufacturer="Microchip Technology", Supplier Part Number 1=MCP2003A-E/SN-ND, PartNumber=MCP2003A-E/SN, Supplier 1=Digi-Key
U8 U9: library part MCP2558FD, "Microchip CAN FD Transceiver with Silent Mode", Manufacturer=Microchip, PartNumber=MCP2558FDT-H/MNY, Supplier Part Number 1=MCP2558FDT-H/MNYCT-ND, Supplier 1=Digi-Key
U11: "SMARTCONNECT ATWINC1500B-MU-T MO", Manufacturer="Microchip Technologies", PartNumber=ATWINC1510-MR210PB1140, Supplier Part Number 1=ATWINC1510-MR210PB1140-ND, Supplier 1=Digi-Key
U12: library part "Optoisolator - Dual", "Optoisolator Transistor Output 2500Vrms 2 Channel 8-SO Tall", Manufacturer="Fairchild/ON Semiconductor", Supplier Part Number 1=MOCD207R2MCT-ND, PartNumber=MOCD207R2M, Supplier 1=Digi-Key
U13: library part "NCP1117 2.5V", "Linear Voltage Regulator IC Positive Fixed Output 3.3V 1A SOT-223", Manufacturer="On Semiconductor", PartNumber=NCP1117LPST33T3G, Supplier Part Number 1=NCP1117LPST33T3GOSCT-ND, Supplier 1=Digi-Key
U14: "CANbus Controller CAN 2.0 SPI Interface 14-VDFN (4.5x3)", Manufacturer="Microchip Technology", PartNumber=MCP2517FDT-H/JHA, Supplier Part Number 1=MCP2517FDT-H/JHACT-ND, Supplier 1=Digi-Key
U15: library part ATECC508A, "Authentication Chip IC Networking and Communications 8-SOIC", Manufacturer="Microchip Technology", PartNumber=ATECC608A-SSHDA-T, Supplier Part Number 1=ATECC608A-SSHDA-TCT-ND, Supplier 1=Digi-Key
U16: "32 Bit Microcontroller, Kinetis L Series Ultra Low Power, ARM Cortex-M0+, 48 MHz, 32 KB, 4 KB, 16", Manufacturer=PJRC, PartNumber="Pre Programmed MKL02Z32VFG4", Supplier Part Number 1=IC_MKL02Z32_QFN16, Alternative="Sole Source", Supplier 1=PJRC
USB1: library part USB-Rugged, "USB - mini B USB 2.0 Receptacle Connector 5 Position Surface Mount, Right Angle; Through Hole", Manufacturer=Hirose, Supplier Part Number 1=H11589CT-ND, PartNumber=UX60SC-MB-5S8, Supplier 1=Digi-Key
X1: library part "Crystal Oscillator", "Canned Oscillator", Manufacturer="ECS Inc.", PartNumber=ECX-.327-CDX-1293, Supplier Part Number 1=XC2292CT-ND, Supplier 1=Digi-Key
Y1: library part "Crystal with Ground", "40MHz ±10ppm Crystal 10pF 40 Ohms 4-SMD, No Lead", Manufacturer="ECS Inc.", PartNumber=ECS-400-10-37B-CKY-TR, Supplier Part Number 1=XC3069CT-ND, Supplier 1=Digi-Key
Y3: library part "Crystal with Ground", "16MHz ±30ppm Crystal 18pF 80 Ohms 4-SMD, No Lead", Manufacturer="ECS Inc.", PartNumber=XC2866CT-ND, Supplier 1=Digi-Key, Supplier Part Number 1=XC2866CT-ND
Z1: library part "Zener - Bidirectional", "TVS DIODE 20VWM 36.8VC SMA", Manufacturer="Micro Commercial Co", PartNumber=SMA6J24CA-TP, Supplier Part Number 1=SMA6J24CA-TPMSCT-ND, Supplier 1=Digi-Key

## Free pads (board coordinates)
  round 220 hole 126: 0(1563,1564) 0(2665,1564) 0(2665,3690)

## Via types
v1: diameter 15, hole 9, Component Side to Solder Side, 290 vias
v2: diameter 20, hole 10, Component Side to Solder Side, 66 vias
v3: diameter 20, hole 13, Component Side to Solder Side, 12 vias
v4: diameter 50, hole 28, Component Side to Solder Side, 4 vias

## Nets (pads, with @x,y where several pads share a name; then routed paths per layer and width w, separated by ;. In a path a pad name is that pad's centre, name@x,y a point inside that pad or via, vN(x,y) a via of type N, cw(c..) or ccw(c..) an arc to the next point about the centre after c; other vN are vias at no path point)
3V3: C7.2 C8.2 C9.2 C13.2 C16.2 C18.2 C19.2 C20.2 C28.1 D8.1 I2C.4 J2.1 J3.2 JTAG/SWD.1 L1.2 P2.1 R1.1 R10.2 R16.2 R22.1 R32.2 R33.2 R34.1 SD1.4 SPI1.6 U3.6 U4.8 U5.5 U6.E5 U6.E6 U6.E7 U6.E8 U6.F5 U6.F8 U6.G1 U8.5 U9.5 U13.2 U13.4 U14.14 U15.8 UART1.4 | length 17924.8
  Component Side w10: U6.G1@1888.78,2092.48 1907.64,2111.34 1907.64,2138.01 1920.34,2150.71 2027.4,2150.71 U6.F5@2046.26,2131.85
  Component Side w12: I2C.4@1370,4185 1366,4185 1366,4064 1364,4062 1364,3770 1365,3769 1450,3769 1501,3718 1501,3302.4 D8.1@1510,3302.4 ; R10.2@1485,2644.53 1506.75,2666.28 ; v1(1524.94,2666.28) 1506.75,2666.28 ; v1(1533,1270) 1533,1341.27 J3.2@1548.7,1356.97 ; U8.5@1660.94,2995 1660.94,2984.5 1651,2984.5 1649.63,2983.13 1649.63,2952.87 1655,2947.5 C16.2@1655,2910.68 1516,2771.68 1516,2675.53 1506.75,2666.28 ; L1.2@1710.47,2104.53 C20.2@1770,2104.53 1809,2065.53 ; v1(1732,1663) 1735,1663 1737.4,1665.4 1750.3,1652.5 1769.01,1633.8 1809,1673.79 1809,2065.53 ; U5.5@1815,3155 1815,3075 1837,3053 2106.04,3053 2305.5,2853.54 2305.5,2753 ; U6.G1@1888.78,2092.48 1859.3,2063 1811.53,2063 1809,2065.53 ; C13.2@1920,2494.53 v1(1920,2523) ; v1(1920,2660) C28.1@2013.15,2660 ; v1(1967.52,1429.28) 1991.28,1429.28 2079.75,1340.81 SD1.4@2079.75,1034.8 ; U6.F5@2046.26,2131.85 U6.E5@2046.26,2171.22 U6.E6@2085.63,2171.22 U6.E7@2125,2171.22 U6.E8@2164.37,2171.22 U6.F8@2164.37,2131.85 ; 2171,2660 2313.21,2517.79 R16.2@2440.47,2517.79 2440.47,2453 2430.47,2443 R32.2@2430.47,2380 2430.47,2309 2444,2295.47 2444,2292.91 R33.2@2426.09,2275 2457.6,2243.49 C7.2@2457.6,2161.38 2472.98,2146 v1(2499.52,2146) ; v1(2390.28,1224.37) 2425.16,1224.37 C8.2@2450,1199.53 2471.26,1220.79 U14.14@2471.26,1287.91 ; U9.5@2505,1659.17 U9.5@2505,1660 ; C9.2@2509.37,1745.47 2509.37,1704.37 2505,1700 U9.5@2505,1660 ; JTAG/SWD.1@2813,3155 JTAG/SWD.1@2849.06,3155 ; U13.4@3018.15,3245.16 U13.4@3079.45,3245.16 3079.45,3150 U13.2@3079.45,3005 ; U4.8@3039.49,3790 3039.49,3843 3030.55,3851.94 C19.2@3030.55,3906.38 3003,3933.93 3003,3992 3004,3993 3068,3993 P2.1@3185,4110 3185,3976.03 U3.6@3195.43,3965.59 ; v1(3140,1986.65) J2.1@3184.02,1986.65 ; U9.5@2505,1660 2547,1702 2722.16,1702 2750.91,1673.25 2898.78,1673.25 R1.1@2925.53,1700 R22.1@2925.53,1760 2857.53,1828 2844,1828 2843,1829 2843,1878 2840,1881 U15.8@2785,1881 ; U15.8@2785,1881 2783.46,1881 2755.12,1908.12 C18.2@2728.25,1935 2750.25,1957 v1(2766,1957) 2785,1938 U15.8@2785,1881
  Component Side w20: C28.1@2013.15,2660 2171,2660 2212.5,2660 2305.5,2753 2308,2750.5 2643.5,2750.5 2810.5,2917.5 2810.5,3152.5 JTAG/SWD.1@2813,3155 ; JTAG/SWD.1@2849.06,3155 2927.99,3155 U13.4@3018.15,3245.16
  Signal Layer 2 w12: v1(1967.52,1429.28) 1990.66,1429.28 2058.06,1361.89 2058.06,1224.37
  Signal Layer 2 w15: I2C.4@1370,4185 1413,4142 1762,4142 UART1.4@1805,4185 1848,4142 ; v1(1524.94,2666.28) 1543.24,2647.97 1907.97,2647.97 v1(1920,2660) ; v1(1533,1270) 1542,1261 1666.72,1261 1682.22,1245.5 1704.7,1245.5 1725.83,1224.37 2058.06,1224.37 v1(2390.28,1224.37) ; v1(1732,1663) 1732,1525.72 1746.72,1511 1763.28,1511 1870.28,1618 v1(2122.5,1618) ; SPI1.6@2440,4185 2397,4142 1848,4142 ; v1(2499.52,2146) 2550.21,2146 2719.96,1976.25 2746.75,1976.25 v1(2766,1957) ; 3119,4051 2529,4051 2528.01,4051.99 1938.01,4051.99 1848,4142 ; v1(3140,1986.65) 2874.65,1986.65 ; P2.1@3185,4110 3119,4044 3119,3770.5 3137.5,3752 3189,3752 3210,3731 3210,3631.28 3158.72,3580 2962.5,3580 2917,3534.5 2917,3055.11 3122.3,2849.81 3122.3,2035.42 3110.58,2023.7 3094.02,2023.7 3086,2031.72 3086,1987 2875,1987 2874.65,1986.65 ; v1(2766,1957) 2766,1946 2767,1945 2785.09,1945 ; v1(2766,1957) 2784.09,1975.09 2784.09,1946 2785.09,1945 ; 2785.09,1945 2820.85,1945 ; 2820.85,1945 2833,1945 2874.65,1986.65 ; 2820.85,1945 2862.5,1986.65 2874.65,1986.65
  Signal Layer 1 w15: v1(1533,1270) 1533,1297.79 1732,1496.79 v1(1732,1663) ; v1(1920,2523) v1(1920,2660)
  Solder Side w12: v1(2122.5,1618) 2455.5,1951 2607.34,1951 2613.34,1957 v1(2766,1957)
  other v2: 2975,3075 3000,3075 3025,3075 3050,3075 3075,3075 3100,3075 3125,3075 3150,3075 3175,3075 3200,3075 2962.5,3100 2987.5,3100 3012.5,3100 3037.5,3100 3062.5,3100 3087.5,3100 3112.5,3100 3137.5,3100 3162.5,3100 3187.5,3100 2975,3125 3000,3125 3025,3125 3050,3125 3075,3125 3100,3125 3125,3125 3150,3125 3175,3125 3200,3125 2962.5,3150 2987.5,3150 3012.5,3150 3037.5,3150 3062.5,3150 3087.5,3150 3112.5,3150 3137.5,3150 3162.5,3150 3187.5,3150 2975,3175 3000,3175 3025,3175 3050,3175 3075,3175 3100,3175 3125,3175 3150,3175 3175,3175 3200,3175 2962.5,3200 2987.5,3200 3162.5,3200 3187.5,3200 2975,3225 3000,3225 3175,3225 3200,3225 2962.5,3250 2987.5,3250 3162.5,3250 3187.5,3250 2975,3275 3000,3275 3175,3275 3200,3275